# Altium PCB PCB1.PcbDoc
Units mil, origin at the board's own origin, x right, y up, seen from the top; angles counter-clockwise.
Board outline 1574.8 x 1400.79 mil, 2 copper layers (Top Layer, Bottom Layer); 62 components, 56 nets, 272 pads, 59 vias.
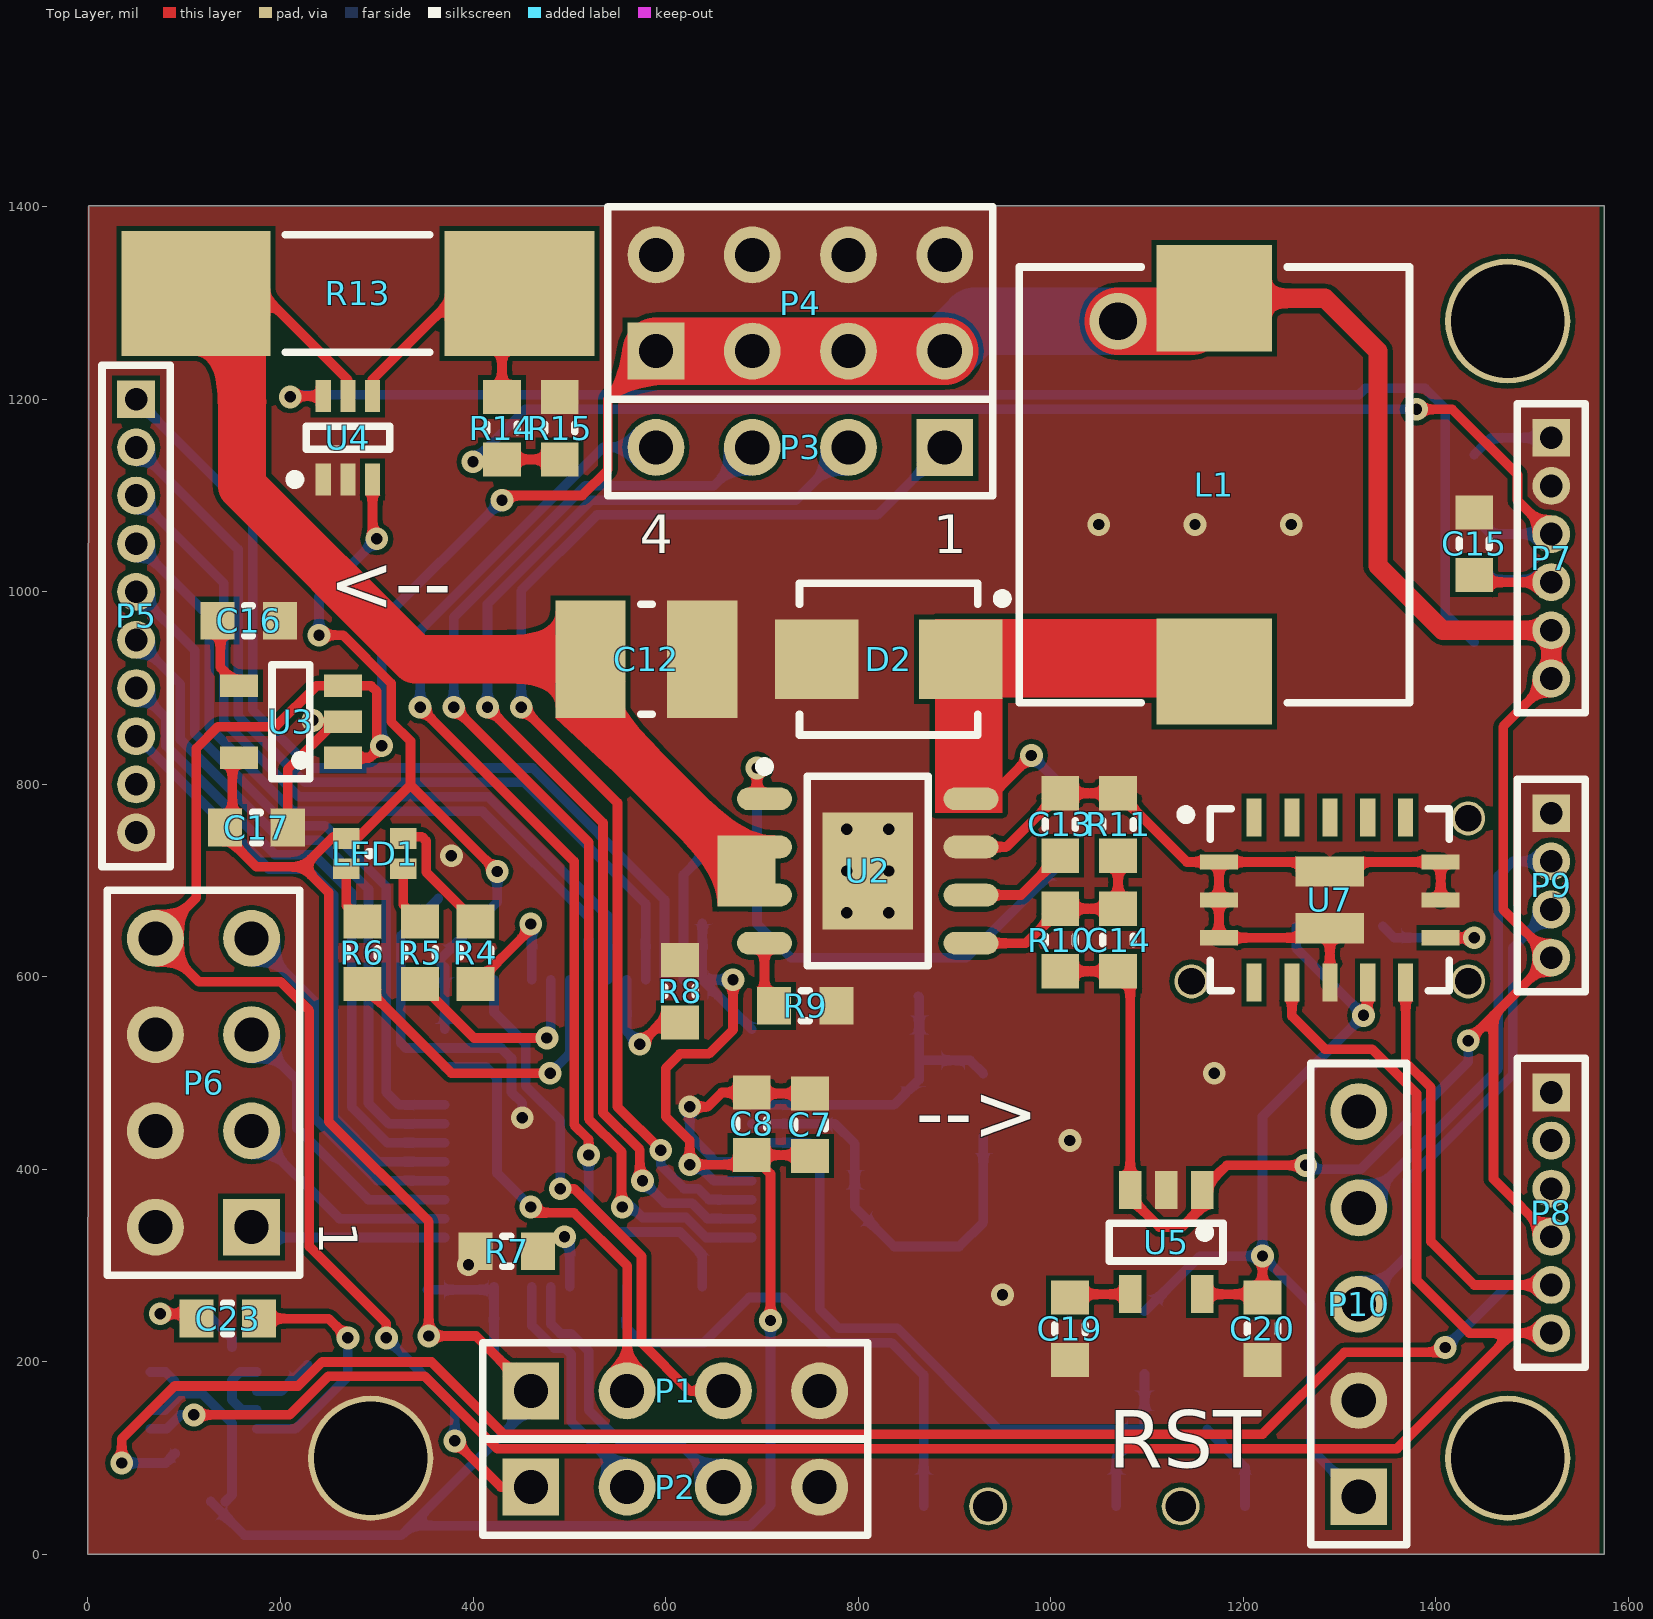
[diagram p0: Top Layer view]
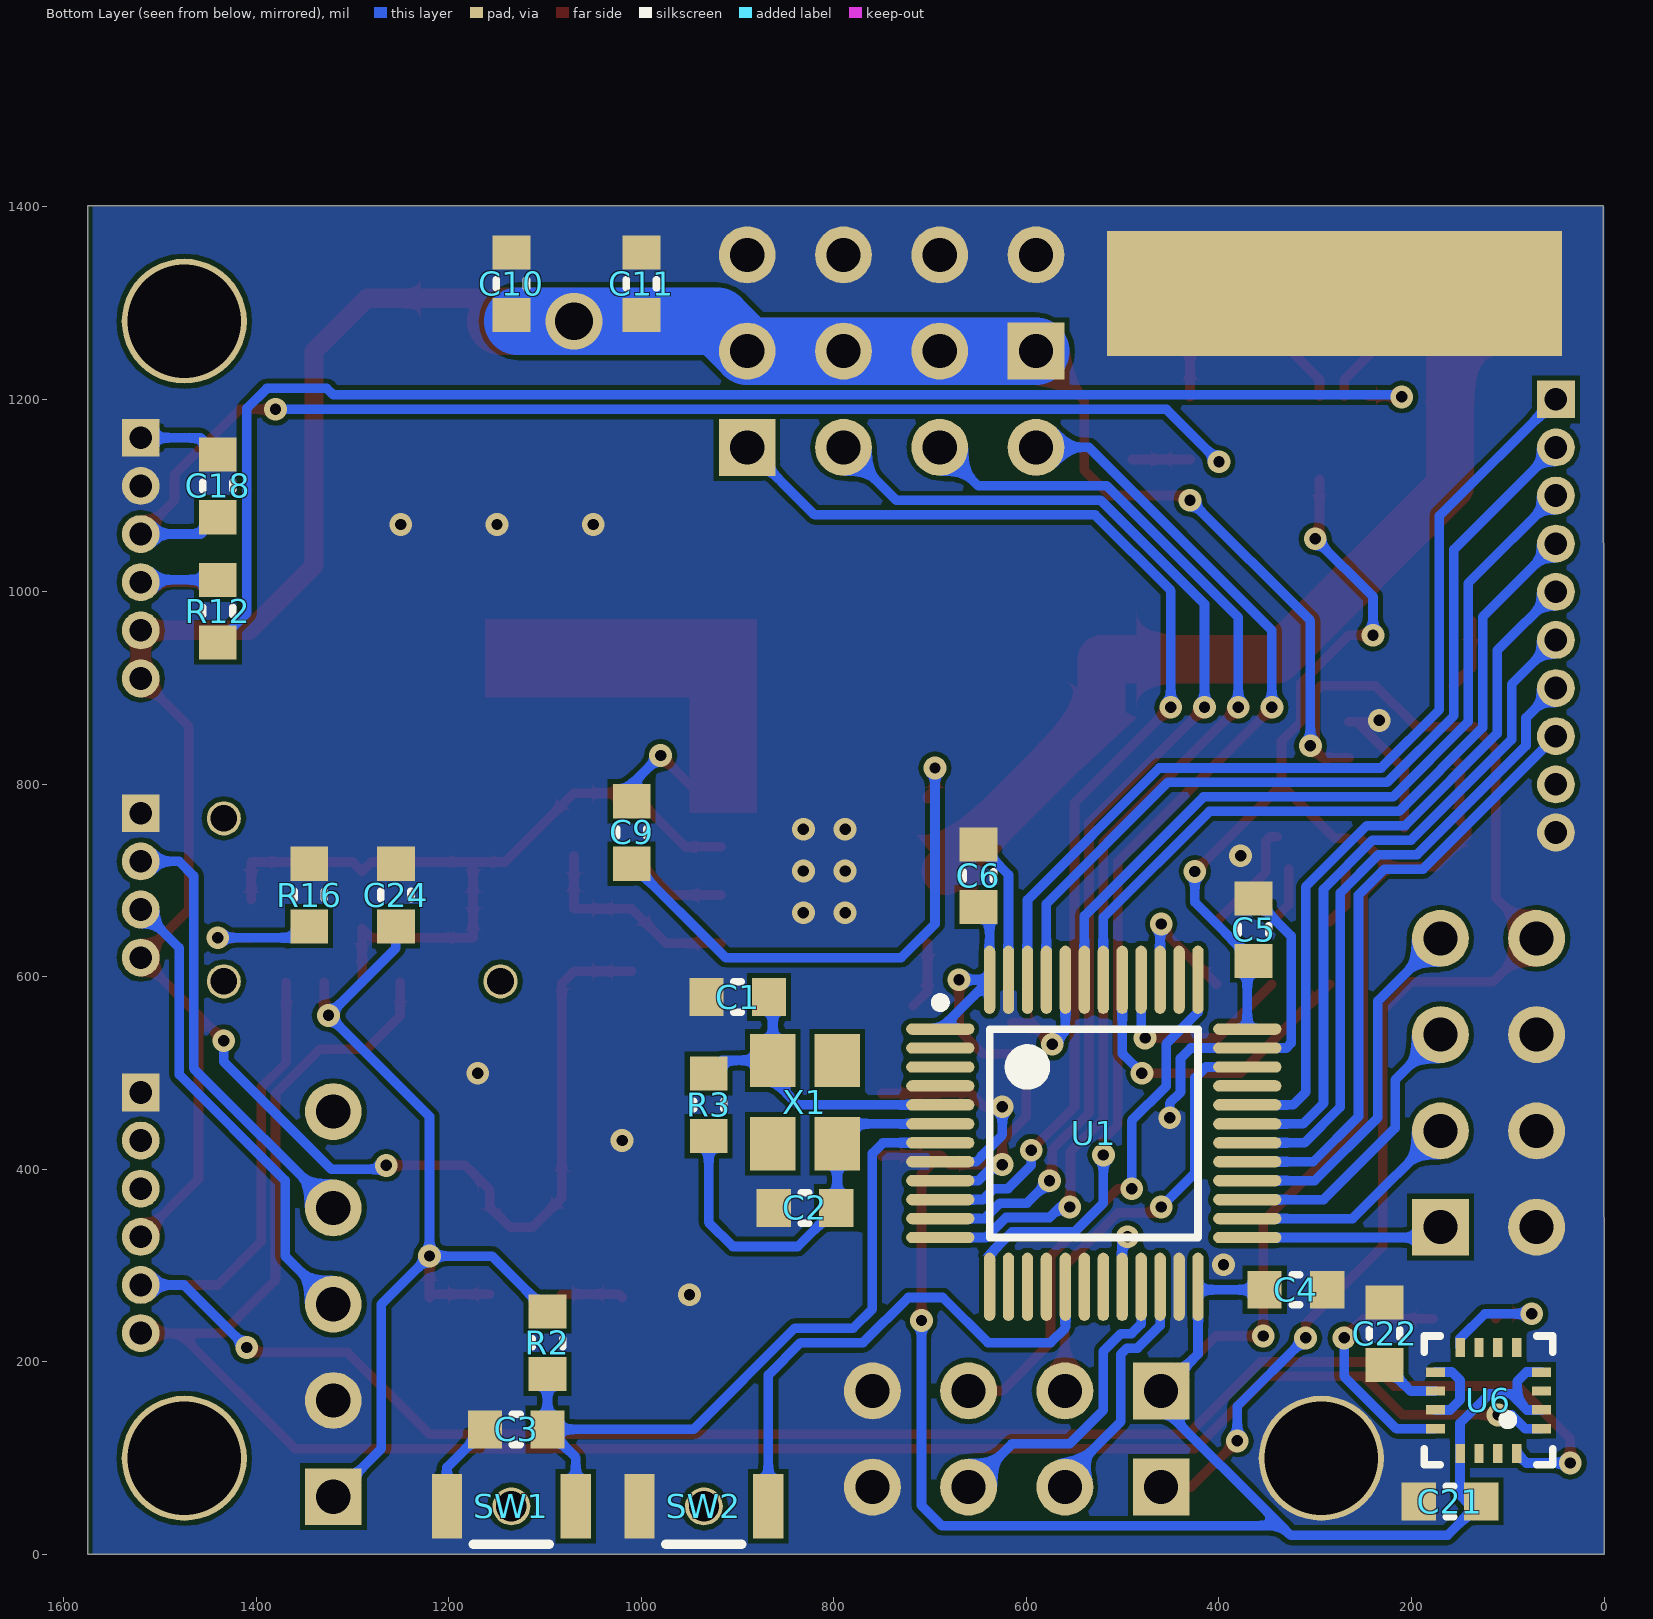
[diagram p1: Bottom Layer view, seen from below]

## Layer stack, top to bottom
Top Solder: solder mask 0.4, Solder Resist, Dk 3.5
Top Layer: signal copper 1.4
Dielectric 1: dielectric 12.6, FR-4, Dk 4.8
Bottom Layer: signal copper 1.4
Bottom Solder: solder mask 0.4, Solder Resist, Dk 3.5

## Board outline
0,0 1574.8,0 1574.8,1400.79 0.79,1400.79

## Design rules (kind name [scope] priority, off if disabled: settings)
Clearance [All] p1: gap=5 ignorepadtopadclearanceinfootprint=FALSE except(0: Arc-Hole Track-Hole SMDPad-Hole THPad-Hole Via-Hole Fill-Hole Poly-Hole Region-Hole Text-Hole)
PolygonConnect [All] p1: connectstyle=Direct reliefconductorwidth=10 reliefentries=4 polygonreliefangle="90 Angle" airgapwidth=10
RoutingVias [All] p1: holewidth=11.81 width=23.62 viastyle="Through Hole" minholewidth=11.81 minwidth=23.62 maxholewidth=27.56 maxwidth=78.74
SolderMaskExpansion [All] p1: expansion=4
Width [All] p1: maxlimit=200 minlimit=10 preferedwidth=10 minimp=50.000000 maximp=50.000000 favimp=50.000000
30 further rules are at their usual default settings.

## Components (designator, comment, footprint, x,y, rotation, side; value= is the part's Value field where it differs from the comment)
C1 "20pF" 0603 900,579.02 r0 bottom
C2 "20pF" 0603 830,360 r0 bottom
C3 "1uF" 0603 1130,130 r0 bottom
C4 "100nF" 0603 320,275 r0 bottom
C5 "100nF" 0603 364,649 r270 bottom
C6 "100nF" 0603 649.96,705 r270 bottom
C7 "100nF" 0603 750,446.36 r90 top
C8 "10uF" 0603 689.45,447.36 r90 top
C9 "100nF" 0603 1010,750 r90 bottom
C10 "22uF" 0603 1135,1320 r270 bottom
C11 "22uF" 0603 1000,1320 r270 bottom
C12 "10uF" 1210 580,930 r180 top
C13 "8.2nF" 0603 1010,758.31 r270 top
C14 "330pF" 0603 1070,638.31 r270 top
C15 "1uF" 0603 1440,1050 r90 top
C16 "470pF" 0603 166.81,970 r180 top
C17 "2.2uF" 0603 175,755 r180 top
C18 "100nF" 0603 1440,1110 r270 bottom
C19 "470pF" 0603 1020,234.53 r90 top
C20 "2.2uF" 0603 1220,234.53 r90 top
C21 "100nF" 0603 160,55 r0 bottom
C22 "4.7uF" 0603 228,229.39 r270 bottom
C23 "0.22uF" 0603 145,245 r0 top
C24 "100nF" 0603 1255,685 r90 bottom
D2 "SK1045B" "SMB (DO-214AA)" 831.65,930 r0 top
L1 "Inductor" Ind1040 1170,1111 r90 top
LED1 "RGB_CA" RGB1.6*1.6 297.93,728.13 r270 top
P1 "Header 4" HDR1X4 460,170 r0 top
P2 "Header 4" HDR1X4 460,70 r0 top
P3 "Header 4" HDR1X4 890,1150 r180 top
P4 "Header 4X2" HDR2X4 590,1250 r0 top
P5 "MHDR1X10" MHDR1X10 50,1200 r270 top
P6 "Header 4X2" HDR2X4 170,340 r90 top
P7 "MHDR1X6" MHDR1X6 1520,1160 r270 top
P8 "MHDR1X6" MHDR1X6 1520,480 r270 top
P9 "MHDR1X4" MHDR1X4 1520,770 r270 top
P10 "Header 5" HDR1X5 1320,60 r90 top
R2 "10k" 0603 1097.52,220 r90 bottom
R3 "1M" 0603 930,467.05 r90 bottom
R4 "1k" 0603 402.52,625 r270 top
R5 "1k" 0603 345,625 r270 top
R6 "1k" 0603 285,625 r270 top
R7 "10k" 0603 435,315 r180 top
R8 "10k" 0603 615,585 r270 top
R9 "20k" 0603 745,570 r180 top
R10 "91k" 0603 1010,638.31 r270 top
R11 "15k" 0603 1070,758.31 r270 top
R12 "680" 0603 1440,980 r90 bottom
R13 "1mR" 2512 280,1310 r180 top
R14 "4.7k" 0603 430,1170 r90 top
R15 "1k" 0603 490,1170 r270 top
R16 "0R" 0603 1345,685 r270 bottom
SW1 "Btn" BTN_B3U_B 1135,50 r0 bottom
SW2 "Btn" BTN_B3U_B 935,50 r0 bottom
U1 "STM32F103C8T6" LQFP48_N 530,437.52 r180 bottom
U2 "LMR14030 EZ" SOP8-Pad 810,710 r0 top
U3 "MIC5219" SOT23-5 210.83,865 r180 top
U4 "INA190" SC70 270,1160 r90 top
U5 "MIC5219" SOT23-5 1120,324.53 r270 top
U6 "QMC5883L" QMC5883 120,160 r0 bottom
U7 "SDP3x_D" SDP3x 1290,680 r0 top
X1 "8M" XTAL-3225-4 830,470 r90 bottom

## Footprints (in the part's own frame and the unit in brackets; to place one, negate y for a bottom-side part, rotate by r counter-clockwise, add the part's x,y. Pads: shape width x height; smd on the part's side, far side on the other; paste and mask are expansions set on the pad)
0603 [mm]
  rect 0.9x1 smd: 1(-0.825,0) 2(0.825,0)
  silkscreen extent -0.1,-0.4 0.1,0.4
1210 [mm]
  rect 1.85x3.1 smd: 1(-1.475,0) 2(1.475,0)
  silkscreen extent -0.15,-1.45 0.15,1.45
2512 [mm]
  rect 1.15x3.3 smd: 1(-2.875,0) 2(2.875,0)
  silkscreen extent -1.9,-1.55 1.9,1.55, body extent -3.3,-1.7 3.3,1.7, height 0.65
BTN_B3U_B [mm]
  rect 0.8x1.7 smd: 1(-1.7,0) 2(1.7,0)
  round 1 hole 0.8: ""(0,0)
  silkscreen extent -1,1 1,1
HDR1X4 [mm] "Connector; Header; 4 Position"
  rect 1.5x1.5 hole 0.9: 1(0,0)
  round 1.5 hole 0.9: 2(2.54,0) 3(5.08,0) 4(7.62,0)
  silkscreen extent -1.27,-1.27 8.89,1.27
HDR1X5 [mm] "Connector; Header; 5 Position"
  rect 1.5x1.5 hole 0.9: 1(0,0)
  round 1.5 hole 0.9: 2(2.54,0) 3(5.08,0) 4(7.62,0) 5(10.16,0)
  silkscreen extent -1.27,-1.27 11.43,1.27
HDR2X4 [mm] "Connector; Header; 4x2 Position"
  rect 1.5x1.5 hole 0.9: 1(0,0)
  round 1.5 hole 0.9: 2(0,2.54) 3(2.54,0) 4(2.54,2.54) 5(5.08,0) 6(5.08,2.54) 7(7.62,0) 8(7.62,2.54)
  silkscreen extent -1.27,-1.27 8.89,3.81
Ind1040 [mm] "Inductor 11.5*10*4"
  rect 2.8x3.05 smd: 1(-4.925,0) 2(4.925,0)
  silkscreen extent -5.75,-5.15 5.75,5.15
LQFP48_N [mm] "Thin QFP, 48-Leads, Body 7x7mm, Pitch 0.5mm, IPC Medium Density"
  oval 1.8x0.3 smd: 1(-4.05,2.75) 2(-4.05,2.25) 3(-4.05,1.75) 4(-4.05,1.25) 5(-4.05,0.75) 6(-4.05,0.25) 7(-4.05,-0.25) 8(-4.05,-0.75) 9(-4.05,-1.25) 10(-4.05,-1.75) 11(-4.05,-2.25) 12(-4.05,-2.75) 25(4.05,-2.75) 26(4.05,-2.25) 27(4.05,-1.75) 28(4.05,-1.25) 29(4.05,-0.75) 30(4.05,-0.25) 31(4.05,0.25) 32(4.05,0.75) 33(4.05,1.25) 34(4.05,1.75) 35(4.05,2.25) 36(4.05,2.75)
  oval 0.3x1.8 smd: 13(-2.75,-4.05) 14(-2.25,-4.05) 15(-1.75,-4.05) 16(-1.25,-4.05) 17(-0.75,-4.05) 18(-0.25,-4.05) 19(0.25,-4.05) 20(0.75,-4.05) 21(1.25,-4.05) 22(1.75,-4.05) 23(2.25,-4.05) 24(2.75,-4.05) 37(2.75,4.05) 38(2.25,4.05) 39(1.75,4.05) 40(1.25,4.05) 41(0.75,4.05) 42(0.25,4.05) 43(-0.25,4.05) 44(-0.75,4.05) 45(-1.25,4.05) 46(-1.75,4.05) 47(-2.25,4.05) 48(-2.75,4.05)
  silkscreen extent -4.18,-2.75 2.75,3.57, body extent -3.5,-3.5 3.5,3.5, height 1.6
MHDR1X4 [mm] "Connector; Header; 4 Position"
  rect 1x1 hole 0.6: 1(0,0)
  round 1 hole 0.6: 2(1.27,0) 3(2.54,0) 4(3.81,0)
  silkscreen extent -0.9,-0.9 4.71,0.9
MHDR1X6 [mm] "Connector; Header; 6 Position"
  rect 1x1 hole 0.6: 1(0,0)
  round 1 hole 0.6: 2(1.27,0) 3(2.54,0) 4(3.81,0) 5(5.08,0) 6(6.35,0)
  silkscreen extent -0.9,-0.9 7.25,0.9
MHDR1X10 [mm] "Connector; Header; 10 Position"
  rect 1x1 hole 0.6: 1(0,0)
  round 1 hole 0.6: 2(1.27,0) 3(2.54,0) 4(3.81,0) 5(5.08,0) 6(6.35,0) 7(7.62,0) 8(8.89,0) 9(10.16,0) 10(11.43,0)
  silkscreen extent -0.9,-0.9 12.33,0.9
QMC5883 [mm]
  rect 0.5x0.25 smd: 1(-1.4,0.75) 2(-1.4,0.25) 3(-1.4,-0.25) 4(-1.4,-0.75) 9(1.4,-0.75) 10(1.4,-0.25) 11(1.4,0.25) 12(1.4,0.75)
  rect 0.25x0.5 smd: 5(-0.75,-1.4) 6(-0.25,-1.4) 7(0.25,-1.4) 8(0.75,-1.4) 13(0.75,1.4) 14(0.25,1.4) 15(-0.25,1.4) 16(-0.75,1.4)
  silkscreen extent -1.7,-1.7 1.7,1.7, body extent -1.55,-1.55 1.55,1.55, height 0.95
RGB1.6*1.6 [mm]
  rect 0.55x0.7 smd: 1(-0.4,0.75) 2(0.4,0.75) 3(0.4,-0.75) 4(-0.4,-0.75)
  silkscreen extent -0.08,-0.2 0.08,-0.05
SC70 [mm]
  rect 0.85x0.4 smd: 1(-1.1,0.65) 2(-1.1,0) 3(-1.1,-0.65) 4(1.1,-0.65) 5(1.1,0) 6(1.1,0.65)
  silkscreen extent -1.22,-1.1 0.3,1.52, body extent -1.2,-1.07 1.2,1.07, height 1.1
SDP3x [mm] "QFN, 16-Leads, Body 6.00x4.50mm, Pitch 1.00mm, Thermal Pad 1.80x2.60mm, IPC Low Density"
  rect 1x0.4 smd: 1(-2.925,1) 2(-2.925,0) 3(-2.925,-1) 9(2.925,-1) 10(2.925,0) 11(2.925,1)
  rect 0.4x1 smd: 4(-2,-2.175) 5(-1,-2.175) 6(0,-2.175) 7(1,-2.175) 8(2,-2.175) 12(2,2.175) 13(1,2.175) 14(0,2.175) 15(-1,2.175) 16(-2,2.175)
  round 0.9 hole 0.7: ""(-3.65,-2.15) ""(3.65,-2.15) ""(3.65,2.15)
  rect 1.8x0.8 smd: ""(0,-0.75) ""(0,0.75)
  silkscreen extent -3.92,-2.4 3.15,2.4
"SMB (DO-214AA)" [mm] "Molded Diode, 2-Leads, Body 4.38x3.62mm, IPC Medium Density"
  rect 2.2x2.1 smd: 1(-1.9,0) 2(1.9,0)
  silkscreen extent -2.35,-2 3.13,2, body extent -2.35,-1.97 2.35,1.97, height 2.4
SOP8-Pad [mm]
  oval 1.45x0.6 smd: 1(-2.725,1.905) 2(-2.725,0.635) 3(-2.725,-0.635) 4(-2.725,-1.905) 5(2.725,-1.905) 6(2.725,-0.635) 7(2.725,0.635) 8(2.725,1.905)
  rect 2.4x3.1 smd: 9(0,0)
  silkscreen extent -2.85,-2.5 1.6,2.88
SOT23-5 [mm] "SOT23, 5-Leads, Body 2.90x2.80mm, Pitch 0.95mm, IPC Medium Density"
  rect 1x0.6 smd: 1(-1.375,0.95) 2(-1.375,0) 3(-1.375,-0.95) 4(1.375,-0.95) 5(1.375,0.95)
  silkscreen extent -0.5,-1.5 0.5,1.5
XTAL-3225-4 [mm]
  rect 1.4x1.2 smd: 1(-1.1,-0.85) 2(1.1,0.85) ""(-1.1,0.85) ""(1.1,-0.85)

## Part data
C1 C2 C3 C4 C5 C6 C7 C8 C9 C10 C11 C12 C13 C14 C15 C16 C17 C18 C19 C20 C21 C22 C23 C24: library part Cap
D2: library part Diode
P1 P2 P3 P9: "Header, 4-Pin", LatestRevisionDate=17-Jul-2002, LatestRevisionNote="Re-released for DXP Platform.", Publisher="Altium Limited"
P4 P6: "Header, 4-Pin, Dual row", LatestRevisionDate=17-Jul-2002, LatestRevisionNote="Re-released for DXP Platform.", Publisher="Altium Limited"
P5: "Header, 10-Pin", LatestRevisionDate=17-Jul-2002, LatestRevisionNote="Re-released for DXP Platform.", Publisher="Altium Limited"
P7 P8: "Header, 6-Pin", LatestRevisionDate=17-Jul-2002, LatestRevisionNote="Re-released for DXP Platform.", Publisher="Altium Limited"
P10: "Header, 5-Pin", LatestRevisionDate=17-Jul-2002, LatestRevisionNote="Re-released for DXP Platform.", Publisher="Altium Limited"
R2 R3 R4 R5 R6 R7 R8 R9 R10 R11 R12 R13 R14 R15 R16: library part Res
U1: "STM32 ARM-based 32-bit MCU with 64 Kbytes Flash, 48-pin LQFP, Industrial Temperature", ComponentLink1Description="Manufacturer Link", ComponentLink1URL=www.st.com/stm32, ComponentLink2Description=Datasheet, ComponentLink2URL=http://www.st.com/stonline/products/literature/ds/13587.pdf, DatasheetVersion="rev6, Mar-2008", PackageDescription="48-Pin Low-Profile Quad Flat Pack, 7 x 7 mm Body, 0.5 mm Pitch (LQFP48)", PackageReference=LQFP48, PackageVersion=Mar-2008, Published=30-May-2008, Publisher="Altium Limited"
X1: library part XTAL

## Free pads (board coordinates)
  rect 60x74 smd: 3(684,710)
  rect 129.92x129.92 smd: 4(100,1310) 4(461,1310)
  rect 472.44x129.92 smd far side: ""(280,1310)
  round 129.92 hole 118.11: ""(293.7,100) ""(1474.8,100) ""(1474.8,1281.1)

## Via types
v1: diameter 23.62, hole 11.81, Top Layer to Bottom Layer, tented both sides, 58 vias
v2: diameter 59.06, hole 39.37, Top Layer to Bottom Layer, tented both sides, 1 vias

## Nets (pads, with @x,y where several pads share a name; then routed paths per layer and width w, separated by ;. In a path a pad name is that pad's centre, name@x,y a point inside that pad or via, vN(x,y) a via of type N, cw(c..) or ccw(c..) an arc to the next point about the centre after c; other vN are vias at no path point)
+5: C10.2 C11.2 C14.2 L1.2 P2.1 P4.1 P4.3 P4.5 P4.7 P6.8 P7.5 P7.6 P8.4 P9.4 R10.2 U3.1 U3.3 U5.1 U5.3 | length 5025.4
  Top Layer w10: U3.1 292.6,827.6 v1(305,840) 300,845 300,896.46 294.06,902.4 U3.3 237.4,902.4 195,860 135,860 112.52,837.52 112.52,682.52 P6.8 115,595 200,595 230,565 230,320 310,240 v1(310,225) ; v1(381,118) 429,70 P2.1 ; v1@435,1100 513.31,1100 540,1126.69 540,1200 P4.1 ; R10.2 C14.2 1082.6,593.23 U5.3 1082.6,370.42 1113.02,340 1136.3,340 1157.4,361.1 U5.1 1182.89,404.15 v1(1265,404.15) ; L1.2@1146.2,1281.1 L1.2 ; v1(1433.7,533.7) 1460,560 ; P8.4 1460,390 1460,560 ; P7.6 1470,860 1470,670 P9.4 1460,560
  Top Layer w20: L1.2 1285.1,1304.9 1340,1250 1340,1027 1407,960 P7.5 P7.6
  Top Layer w70: P4.1 P4.3 P4.5 P4.7 ; v2(1070,1281.1) L1.2@1146.2,1281.1
  Bottom Layer w10: v1(305,840) 305,970 v1(430,1095) ; v1(310,225) 381,154 v1(381,118) ; C10.2@1128.58,1281.1 C10.2 ; v1(1265,404.15) 1269.15,400 1322.01,400 1433.7,511.69 v1(1433.7,533.7)
  Bottom Layer w70: P4.1 P4.3 P4.5 P4.7 921.1,1281.1 v2(1070,1281.1) C10.2@1128.58,1281.1
BAT_IN: pad.4@461,1310 R13.1 R14.2 U4.4 | length 272.3
  Top Layer w10: U4.4 295.59,1220.59 385,1310 R13.1 ; R14.2 430,1279 pad.4@461,1310
BAT_OUT: C12.2 pad.3 pad.4@100,1310 R13.2 U2.2 U2.3 U4.5 | length 1090.8
  Top Layer w10: R13.2 180,1310 270,1220 U4.5
  Top Layer w50: pad.4@160,1320 160,1110 340,930 C12.2 521.93,872.07 pad.3
GND: C1.2 C2.2 C3.2 C4.1 C5.1 C6.1 C7.2 C8.2 C10.1 C11.1 C12.1 C13.1 C15.2 C16.1 C17.1 C18.1 C19.1 C20.1 C21.2 C22.1 C24.2 D2.1 P1.4 P2.4 P4.2 P4.4 P4.6 P4.8 P5.10 P6.2 P6.4 P6.6 P7.1 P7.2 P8.1 P9.1 P10.2 pad.@280,1310 pad.@293.7,100 R7.2 R8.1 R9.1 R11.1 R15.1 R16.1 SW1.2 SW2.2 U1.8 U1.23 U1.35 U1.47 U2.7 U2.9 U3.2 U4.1 U4.2 U5.2 U6.9 U6.11 U7.1 U7.2 U7.3 U7.6 U7.10 U7.11 U7.@1290,650.47 U7.@1290,709.53 | length 2012.6
  Top Layer w10: C17.1 207.48,815.76 U3.2@256.72,865 ; v1(233.44,866.41) 234.85,865 U3.2@256.72,865 ; U3.2 U3.2@256.72,865 ; v1(625,465) 643.64,465 658.48,479.84 C8.2 690.45,478.84 C7.2 ; U2.7 954.21,735 C13.1 R11.1 1141.42,719.37 U7.1 ; U7.6 1290,650.47 1280.16,640.63 U7.3 U7.2 U7.1 ; U7.10 U7.11 1299.84,719.37 1290,709.53 1280.16,719.37 U7.1
  Bottom Layer w10: U6.11 160,150.16 149.53,160.63 149.53,181.05 158.01,189.53 U6.9 ; C5.1 325,642.48 325,531.1 330,526.1 U1.35 429.16,526.1 439.92,515.34 439.92,480.08 451.18,468.82 v1(451.18,453.79) ; U1.47 618.58,706.1 C6.1 ; v1(625,465) 625,435.85 646.81,414.03 646.81,413.19 652.01,407.99 U1.8 ; C3.2 1201.93,90.55 SW1.2 ; C18.1 1457.52,1160 P7.1
  other v1: 950,269.8 395.23,300.88 1020,430 1170,500 788.35,666.69 831.65,666.69 788.35,710 831.65,710 377.52,725.83 788.35,753.31 831.65,753.31 1050,1070 1150,1070 1250,1070
GPIO1: P6.1 U1.25 | length 205
  Bottom Layer w10: P6.1 180.75,329.25 U1.25
GPIO2: P6.3 U1.26 | length 238.3
  Bottom Layer w10: P6.3 261.06,348.94 U1.26
GPIO3: P6.5 U1.27 | length 300.8
  Bottom Layer w10: P6.5 217,493 217,443 291.38,368.62 U1.27
GPIO4: P6.7 U1.28 | length 375.8
  Bottom Layer w10: P6.7 235,575 235,453.79 300.48,388.31 U1.28
IOUT: C15.1 P7.4 R12.2 | length 164.1
  Top Layer w10: C15.1 1447.52,1010 P7.4
  Bottom Layer w10: R12.2 1517.52,1012.48 P7.4
KEY: SW2.1 U1.17 | length 546.8
  Bottom Layer w10: U1.17 559.53,235.47 575,220 639.88,220 686.88,267 722.65,267 769.65,220 834.53,220 868.07,186.46 SW2.1
LED1: R4.2 U1.39 | length 144.8
  Top Layer w10: R4.2 460,650 v1(460,655)
  Bottom Layer w10: v1(460,655) 461.1,653.9 U1.39
LED2: R5.2 U1.40 | length 217
  Top Layer w10: R5.2 400.96,536.56 v1(476.73,536.56)
  Bottom Layer w10: v1(476.73,536.56) 480.79,540.62 U1.40
LED3: R6.2 U1.41 | length 338.8
  Top Layer w10: R6.2 377.52,500 v1(480,500)
  Bottom Layer w10: v1(480,500) 498.37,518.37 500.47,520.47 U1.41
NetC9_1: C9.1 U2.1 | length 567.1
  Top Layer w10: v1(695,817) 695,795 702.72,787.28 U2.1
  Bottom Layer w10: v1(695,817) 695,655 730,620 912.48,620 C9.1
NetC9_2: C9.2 D2.2 L1.1 U2.8 | length 141.3
  Top Layer w10: U2.8 935,785 v1(980,830)
  Bottom Layer w10: v1(980,830) 1010,800 C9.2
NetC13_2: C13.2 U2.6 | length 109.6
  Top Layer w10: U2.6 969.17,685 C13.2
NetC14_1: C14.1 R10.1 R11.2 U2.5 | length 222.6
  Top Layer w10: U2.5 974.21,635 R10.1 C14.1 R11.2
NetC16_2: C16.2 U3.4 | length 75.5
  Top Layer w10: C16.2@137.52,970 137.52,921.57 U3.4
NetC19_2: C19.2 U5.4 | length 64
  Top Layer w10: C19.2 1023.39,270.39 U5.4
NetC22_2: C22.2 U6.10 | length 64.1
  Bottom Layer w10: U6.10 200.93,169.84 C22.2
NetC23_1: C23.1 U6.8 | length 134
  Top Layer w10: v1(75,250) 107.52,250 C23.1
  Bottom Layer w10: v1(75,250) 123.87,250 149.53,224.34 U6.8
NetC23_2: C23.2 U6.12 | length 245.8
  Top Layer w10: C23.2 250,245 v1(270,225)
  Bottom Layer w10: U6.12 215.47,130.47 270,185 270,212.52
NetLED1_1: LED1.1 R4.1 | length 118.6
  Top Layer w10: LED1.1@339.53,745.75 346.78,745.75 351.24,741.29 351.24,708.76 R4.1
NetLED1_2: LED1.2 R5.1 | length 54.4
  Top Layer w10: LED1.2 327.46,675.02 R5.1@339.53,662.95
NetLED1_3: LED1.3 R6.1 | length 61.8
  Top Layer w10: LED1.3 268.4,674.08 R6.1
NetR7_1: R7.1 U1.20 | length 54.2
  Bottom Layer w10: v1(495,330) 500.47,324.53 U1.20
NetR8_2: R8.2 U1.44 | length 123.8
  Top Layer w10: v1(573.19,530) 595.71,552.52 R8.2
  Bottom Layer w10: U1.44 559.53,543.66 v1(573.19,530)
NetR9_2: R9.2 U2.4 | length 71.1
  Top Layer w10: U2.4 702.72,584.8 R9.2@717.52,570
NetR12_1: R12.1 U4.6 | length 1502.4
  Top Layer w10: v1(210,1202.48) 210.83,1203.31 U4.6
  Bottom Layer w10: v1(210,1202.48) 212.05,1204.53 1320,1204.53 1326.81,1211.34 1389.03,1211.34 1409.91,1190.46 1409.91,977.61 R12.1
NetR16_2: R16.2 U7.9 | length 134.8
  Top Layer w10: U7.9 v1(1440,640.63)
  Bottom Layer w10: R16.2 1356.89,640.63 v1(1440,640.63)
OSC_IN: C1.1 R3.2 U1.5 X1.2 | length 344.1
  Bottom Layer w10: U1.5 837.05,467.05 863.46,493.46 X1.2 ; C1.1@862.48,580 863.46,579.02 X1.2 ; R3.2 916.22,513.31 X1.2
OSC_OUT: C2.1 R3.1 U1.6 X1.1 | length 431.7
  Bottom Layer w10: U1.6 775.87,447.36 X1.1 796.54,360.98 C2.1 837.52,320 905,320 930,345 R3.1
PWM_IN1: P5.8 U1.29 | length 638.4
  Bottom Layer w10: P5.8 188,712 228,712 255,685 255,455 302.01,407.99 U1.29
PWM_IN2: P5.7 U1.30 | length 663.4
  Bottom Layer w10: P5.7 81,869 81,840.21 194.21,727 234.21,727 274,687.21 274,464.79 311.11,427.68 U1.30
PWM_IN3: P5.6 U1.31 | length 692.8
  Bottom Layer w10: P5.6 96,904 96,846.43 200.43,742 240.43,742 291.38,691.05 291.38,468.62 312.64,447.36 U1.31
PWM_IN4: P5.5 U1.32 | length 717
  Bottom Layer w10: P5.5 111,939 111,852.64 206.64,757 246.64,757 310,693.64 310,480 322.95,467.05 U1.32
PWM_IN5: P5.4 U1.42 | length 763.3
  Bottom Layer w10: P5.4 126,974 126,858.85 212.85,772 410,772 520.16,661.84 U1.42
PWM_IN6: P5.3 U1.43 | length 821.4
  Bottom Layer w10: P5.3 141,1009 141,865.07 219.07,787 416.21,787 539.84,663.37 U1.43
PWM_IN7: P5.2 U1.45 | length 905.8
  Bottom Layer w10: P5.2 156,1044 156,871.28 225.28,802 453.21,802 579.21,676 U1.45
PWM_IN8: P5.1 U1.46 | length 965.4
  Bottom Layer w10: P5.1 171,1079 171,877.49 231.49,817 462,817 598.9,680.1 U1.46
PWM_OUT1: P3.1 U1.10 | length 1256.4
  Top Layer w10: v1@458.72,872.07 550,780.79 550,465 v1(595,420)
  Bottom Layer w10: v1(450,880) 450,1001.2 528.8,1080 820,1080 P3.1 ; v1(595,420) 595,404.15 619.15,380 633.64,380 645.02,368.62 U1.10
PWM_OUT2: P3.2 U1.11 | length 1237.9
  Top Layer w10: v1(415,880) 535,760 535,458.79 573.19,420.6 573.19,391.1 v1(575.98,388.31)
  Bottom Layer w10: v1(415,880) 415,987.42 522.58,1095 735,1095 P3.2 ; v1(575.98,388.31) 599.29,365 627.43,365 643.49,348.94 U1.11
PWM_OUT3: P3.3 U1.12 | length 1215.8
  Top Layer w10: v1(380,880) 520,740 520,452.57 554.17,418.4 554.17,361.81 v1(555,360.98)
  Bottom Layer w10: v1(380,880) 380,973.63 516.37,1110 650,1110 P3.3 ; v1(555,360.98) 565,360.98 575.98,350 621.21,350 641.96,329.25 U1.12
PWM_OUT4: P3.4 U1.13 | length 1165
  Top Layer w10: v1(345,880) 505,720 505,446.36 520,431.36 v1(520,415)
  Bottom Layer w10: v1(345,880) 345,959.84 535.16,1150 P3.4 ; v1(520,415) 520,365.14 550.14,335 615,335 638.27,311.73 U1.13
RST: C3.1 R2.1 SW1.1 U1.7 | length 775.8
  Bottom Layer w10: U1.7 749.02,427.68 760,416.69 760,255 780,235 840.74,235 945.74,130 C3.1 ; SW1.1 1068.07,100.55 C3.1 ; R2.1 C3.1
RX: P2.2 U1.22 | length 259.7
  Bottom Layer w10: U1.22 461.1,237.68 484.39,214.39 495.61,214.39 501.82,208.18 501.82,138.18 P2.2@570,70
SCL: P8.6 U6.1 U7.5 | length 2072.8
  Top Layer w10: v1(110,145) 209.41,145 249.41,185 350,185 425,110 1360,110 1480,230 ; U7.5 1250.63,559.37 1285,525 1333.84,525 1380,478.84 1380,285 1435,230 1480,230 ; P8.6 1480,230
  Bottom Layer w10: U6.1 81.53,130.47 96.06,145 v1(110,145)
SDA: P8.5 U6.16 U7.8 | length 2121.9
  Top Layer w10: v1(35,95) 35,120 90,175 218.2,175 243.2,200 356.8,200 431.8,125 1220,125 1305,210 1405,210 v1(1410,215) ; U7.8 1368.74,511.31 1395,485.05 1395,325 1440,280 P8.5
  Bottom Layer w10: v1(35,95) 80.59,95 U6.16 ; v1(1410,215) 1475,280 P8.5
SWCLK: P1.3 U1.37 | length 554.6
  Top Layer w10: v1(490.61,380) 505,380 575,310 575,220 625,170 P1.3
  Bottom Layer w10: U1.37 421.73,563.29 454.92,530.11 454.92,486.29 490.61,450.61 v1(490.61,380)
SWDIO: P1.2 U1.34 | length 463
  Top Layer w10: v1(460,360.98) 465.98,355 505,355 560,300 P1.2
  Bottom Layer w10: U1.34 413.58,506.42 424.92,495.08 424.92,396.06 v1(460,360.98)
TEL_RX: P9.3 P10.3 | length 492.8
  Bottom Layer w10: P10.3 1370,310 1370,388.46 1480,498.46 1480,630 P9.3
TEL_TX: P9.2 P10.4 | length 466.3
  Bottom Layer w10: P10.4 1465,505 1465,705 1480,720 P9.2
TX: P2.3 U1.21 | length 324
  Bottom Layer w10: U1.21 480.79,239.21 490.61,229.39 501.82,229.39 520,211.21 520,150 555,115 615,115 P2.3
UOUT: C18.2 P7.3 R14.1 R15.2 | length 1359.1
  Top Layer w10: R14.1 R15.2 ; v1(1380,1189.53) 1417.17,1189.53 1485,1121.69 1485,1095 P7.3
  Bottom Layer w10: v1(400,1135) 454.53,1189.53 v1(1380,1189.53) ; C18.2 1457.52,1060 P7.3
VCC: C4.2 C5.2 C6.2 C7.1 C8.1 C17.2 C21.1 LED1.4 P1.1 U1.1 U1.9 U1.24 U1.36 U1.48 U3.5 U4.3 U6.2 U6.4 U6.13 | length 3921.5
  Top Layer w10: U3.5 150,820.91 150,762.48 C17.2 142.52,746.73 175,714.25 223.5,714.25 ; v1(240,955) 265,955 315,905 315,865 335,845 335,799.53 ; LED1.4@255,745.75 223.5,714.25 ; LED1.4@266.8,743.88 LED1.4 279.36,743.88 335,799.53 ; U4.3 295.59,1059.41 v1(300,1055) ; v1(425,709.53) 335,799.53 ; P1.1 403,227 v1(354,227) 354,345.75 250,449.75 250,687.76 223.5,714.25 ; v1(670,596.97) 670,545 645,520 615,520 600,505 600,455 625,430 v1(625,405) 679.57,405 C8.1 ; v1(709,243) 709,395.33 C8.1 ; C7.1 749,414.88 C8.1
  Bottom Layer w10: U6.2 80,150.16 90,160.16 ; U6.4 80.47,189.53 90,180 90,160.16 ; C21.1 162.52,20 325.55,20 335.55,30 ; C21.1@142.48,55 149.53,62.05 U6.13 149.53,136.32 119.03,166.81 96.65,166.81 90,160.16 ; v1(240,955) 240,995 v1(300,1055) ; C4.2 418.66,275 U1.24 421.73,208.27 P1.1 460,154.45 335.55,30 ; U1.36 370.55,609.97 C5.2 425,677.52 v1(425,709.53) ; v1(625,405) 633.27,405 649.96,388.31 U1.9 ; C6.2@638.27,655.79 U1.48 ; v1(670,596.97) U1.48 ; U1.1 U1.48 ; v1(709,243) 709,51 688,30 335.55,30
VCC_TEL: C20.2 C24.1 P10.1 R2.2 U5.5 U7.7 | length 995.9
  Top Layer w10: U5.5 1216.61,270.39 C20.2 v1(1220,310) ; v1(1325,560) 1329.37,564.37 U7.7
  Bottom Layer w10: R2.2 1155.04,310 v1(1220,310) ; C24.1 1255,630 v1(1325,560) 1220,455 v1(1220,310) ; P10.1 1270,110 1270,260 v1(1220,310)
pads on no net: P5.9 P8.2 P8.3 P10.5 SW1. SW2. U1.2 U1.3 U1.4 U1.14 U1.15 U1.16 U1.18 U1.19 U1.33 U1.38 U6.3 U6.5 U6.6 U6.7 U6.14 U6.15 U7.4 U7.12 U7.13 U7.14 U7.15 U7.16 U7.@1146.3,595.35 U7.@1433.7,595.35 U7.@1433.7,764.65 X1.

## Polygon pours and split planes (outlines as drawn)
GND on Bottom Layer "Bottom Layer-GND" (solid, pour order 8): 0,1400 1570,1400 1570,0 0,0
GND on Top Layer "Top Layer-GND" (solid, pour order 10): 0,1400 1570,1400 1570,0 0,0

## Other copper
Top Layer:
  rectangle net NetC9_2: 880,890 1162.48,972
  rectangle net NetC9_2: 880,770 950,910

## Silkscreen, mask and mechanical layers (free items; w line width, h text height)
Top Overlay:
  text "4" at 573.19,1040 h40
  text "1" at 878.19,1040 h40
  text "<--" at 250,980 h60
  text "-->" at 860,430 h60
  text "1" at 240,346.34 h40 r270
  text "RST" at 1060,90 h60
Mechanical 1:
  lines w10: 0,0 1574.8,0 1574.8,1400.79 0.79,1400.79 0.79,0.79